# Altium PCB Mach in.PcbDoc
Units mil, origin at the board's own origin, x right, y up, seen from the top; angles counter-clockwise.
Board outline 4565 x 3920 mil, 2 copper layers (Top Layer, Bottom Layer); 54 components, 45 nets, 207 pads, 10 vias.
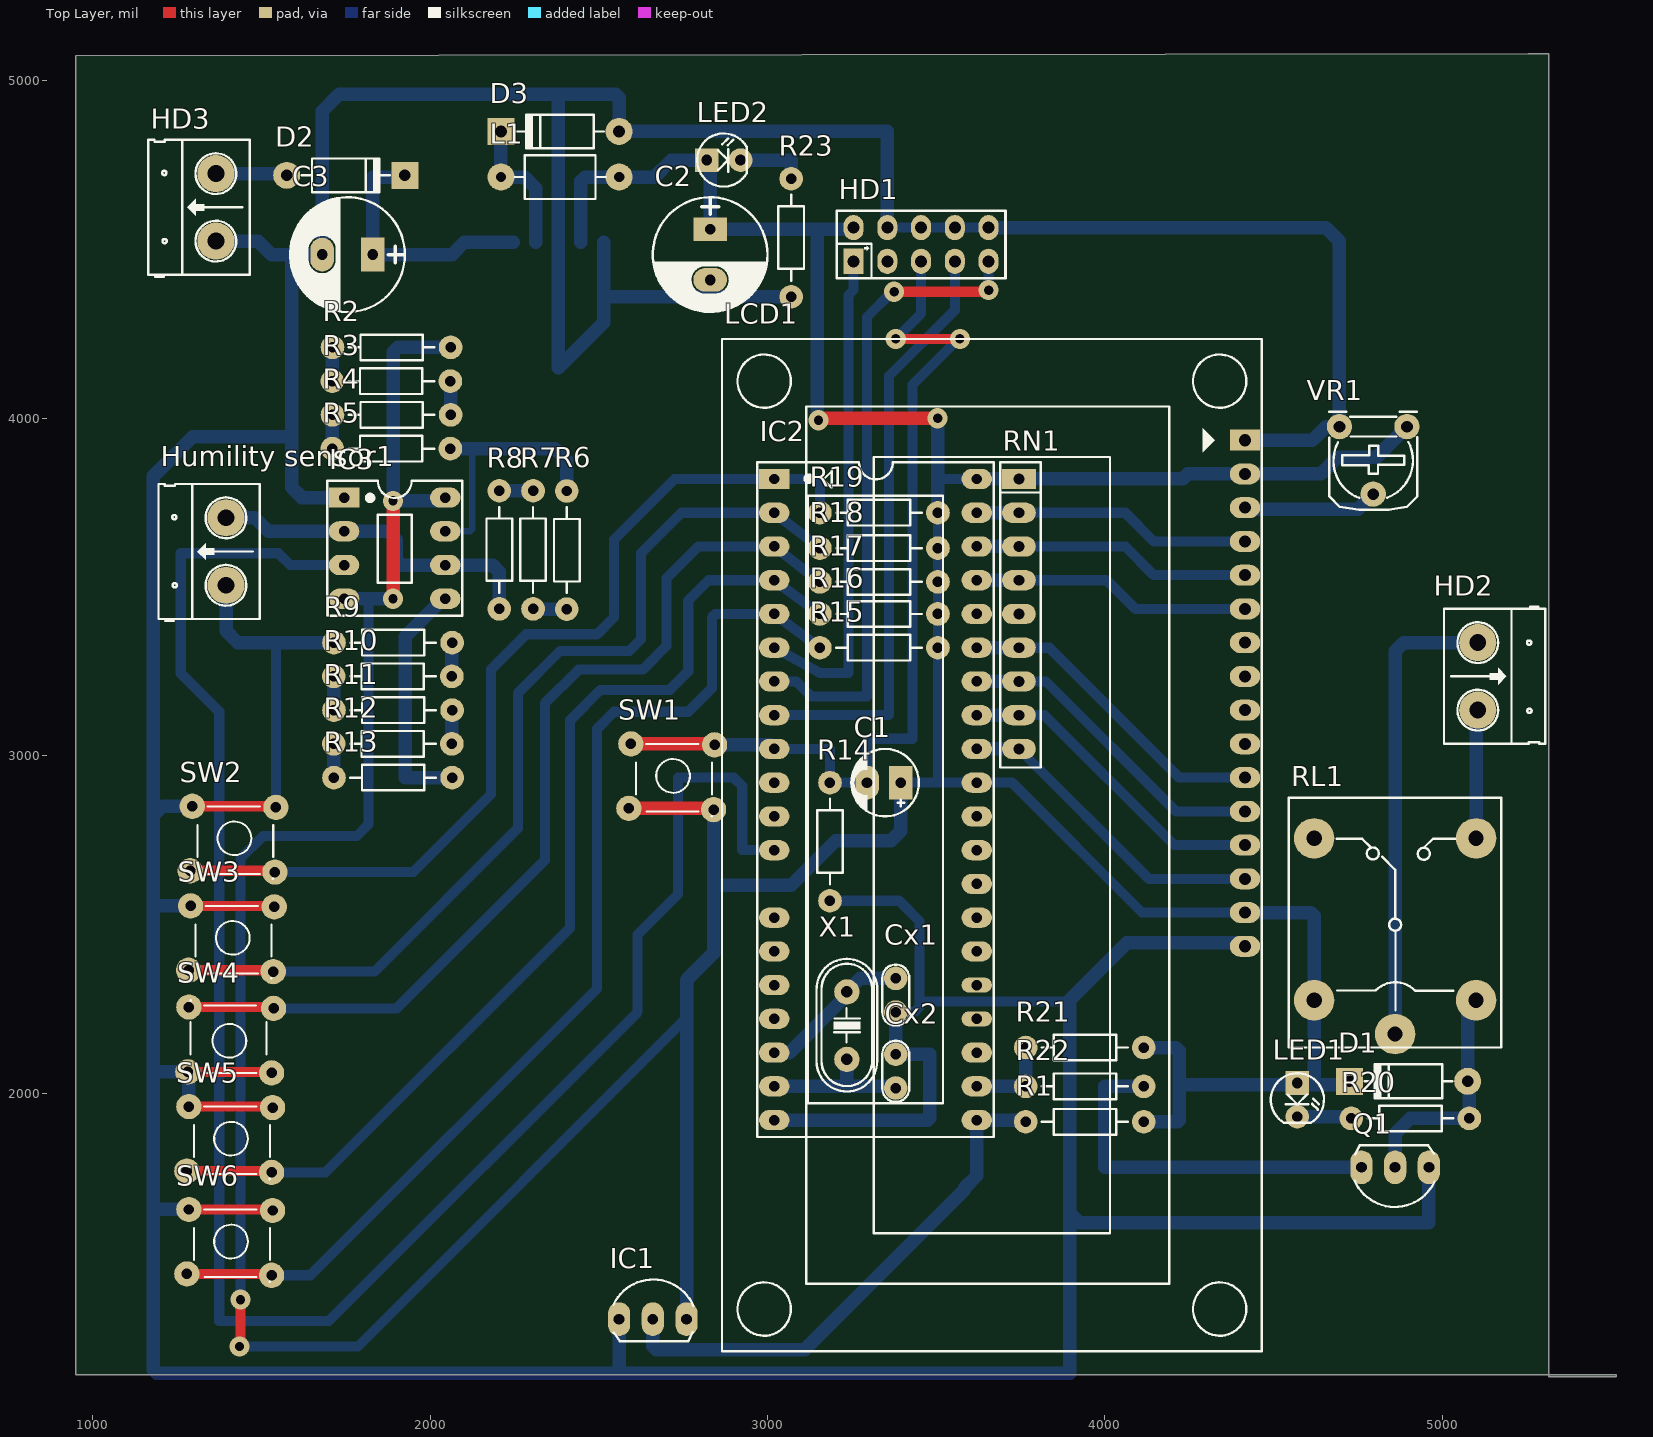
[diagram p0: Top Layer view]
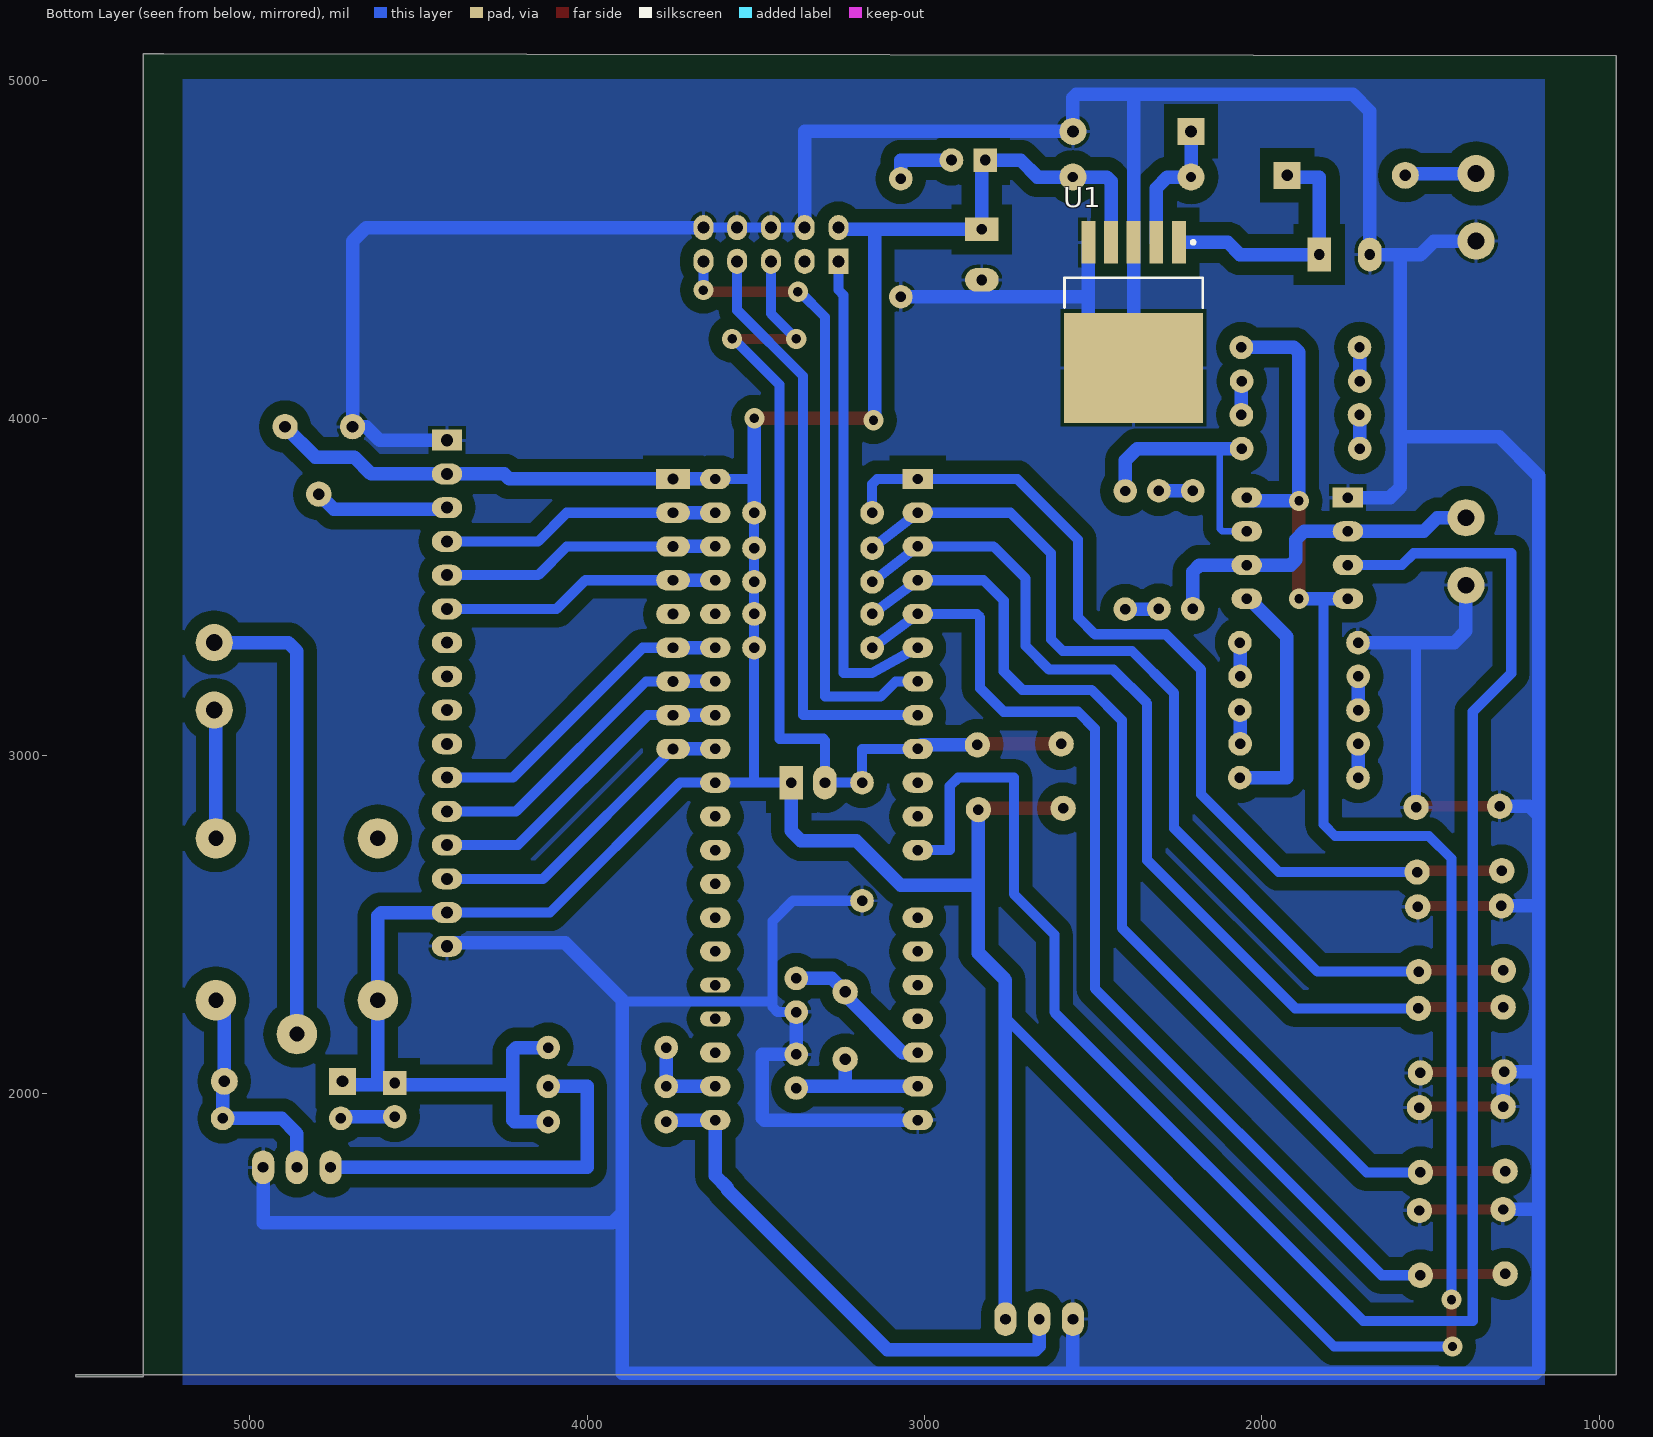
[diagram p1: Bottom Layer view, seen from below]
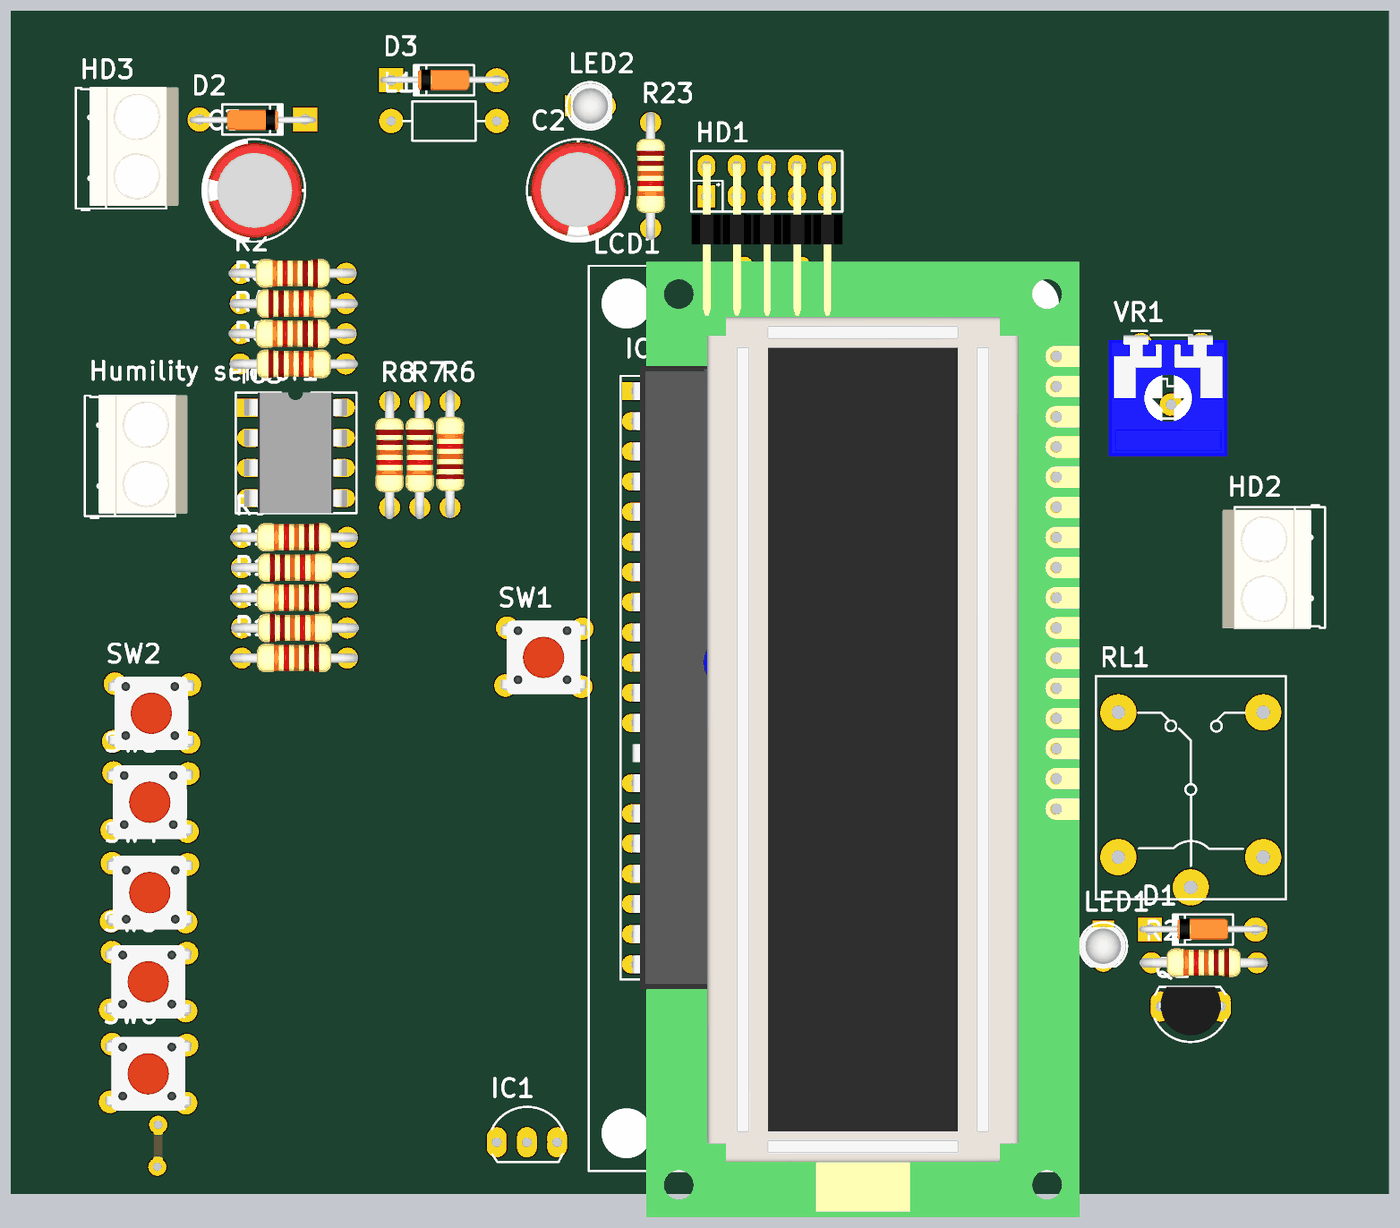
[diagram p2: 3D render of the assembled board from above, using the file's embedded part models]

## Layer stack, top to bottom
Top Layer: signal copper 1.4
Dielectric: dielectric 12.6, FR-4, Dk 4.8
Bottom Layer: signal copper 1.4

## Board outline
950,5075 950,1165 5515,1165 5515,1160 5325,1160 5315,1160 5315,3445 5315,5080 5255,5080

## Design rules (kind name [scope] priority, off if disabled: settings)
Clearance [All] p1: gap=40
PolygonConnect [All] p1: connectstyle=Relief reliefconductorwidth=10 reliefentries=4 polygonreliefangle="90 Angle"
RoutingVias [All] p1: holewidth=28 width=60 viastyle="Through Hole" minholewidth=28 minwidth=60 maxholewidth=28 maxwidth=60
SilkscreenOverComponentPads [All] p1: minsilkscreentomaskgap=10
SolderMaskExpansion [All] p1: expansion=4
Width [All] p1: maxlimit=40 minlimit=20 preferedwidth=30
27 further rules are at their usual default settings.

## Components (designator, comment, footprint, x,y, rotation, side; value= is the part's Value field where it differs from the comment)
C1 "10uF" CP1/2 3395,2920 r180 top
C2 "100uF/35V" CP1.5/3.4 2830,4560 r270 top
C3 "100uF/35V" CP1.5/3.4 1830,4485 r180 top
Cx1 "33pF" CN1 3380,2240 r90 top
Cx2 "33pF" CN1 3380,2115 r270 top
D1 "1N4007" D1A 5075,2035 r0 top
D2 "1N5822" D1A 1575,4720 r180 top
D3 "1N5822" D1A 2560,4850 r0 top
HD1 "Header 5x2" HED2X5_cen 3255,4465 r0 top
HD2 "Header 2" HED2 5105,3335 r270 top
HD3 "Header 2" HED2 1365,4525 r90 top
"Humility sensor1" "ss1" HED2 1395,3505 r90 top
IC1 "DS18S20" DS18S20 2660,1330 r0 top
IC2 "AT89S52" DIP40/W0.6 3020,3820 r270 top
IC3 "LM555" DIP8/W0.3 1745,3765 r270 top
L1 "100mH" L/0.4 2210,4715 r0 top
LCD1 "LCD 16x2A" LCD16X2 4415,3935 r270 top
LED1 "LED" LED-3 4570,2030 r270 top
LED2 "LED" LED-3 2820,4765 r0 top
Q1 "C1815" QTO-92 4860,1780 r180 top
R1 "10k" R1/4W 3765,1915 r0 top
R2 "47k" R1/4W 1710.6,4210 r0 top
R3 "2.7k" R1/4W 2060,4110 r180 top
R4 "100" R1/4W 1710.6,4010 r0 top
R5 "100" R1/4W 2060,3910 r180 top
R6 "560k" R1/4W 2405,3784.4 r270 top
R7 "15k" R1/4W 2305,3435 r90 top
R8 "1k" R1/4W 2205,3435 r90 top
R9 "100" R1/4W 1715,3335 r0 top
R10 "100" R1/4W 2064.4,3235 r180 top
R11 "6.8k" R1/4W 1715,3135 r0 top
R12 "82k" R1/4W 2064.4,3035 r180 top
R13 "820k" R1/4W 1715,2935 r0 top
R14 "10k" R1/4W 3185,2570 r90 top
R15 "10k" R1/4W 3155,3320 r0 top
R16 "10k" R1/4W 3155,3420 r0 top
R17 "10k" R1/4W 3155,3515 r0 top
R18 "10k" R1/4W 3155,3615 r0 top
R19 "10k" R1/4W 3155,3720 r0 top
R20 "1k" R1/4W 4730,1925 r0 top
R21 "10k" R1/4W 3765,2135 r0 top
R22 "4.7k" R1/4W 3765,2020 r0 top
R23 "1k" R1/4W 3070,4360 r90 top
RL1 "Relay 10A/12V" RL_SPDT_10A 4860,2175 r90 top
RN1 "10K" RN8 3745,3820 r270 top
SW1 "SW" SW4 2595,3035 r0 top
SW2 "SW" SW4 1295,2850 r0 top
SW3 "SW" SW4 1290,2555 r0 top
SW4 "SW" SW4 1530,2060 r180 top
SW5 "SW" SW4 1285,1960 r0 top
SW6 "SW" SW4 1285,1655 r0 top
U1 "LM2576" TS5B_N 2380,4285 r270 bottom
VR1 "10K" VR 4895,3975 r180 top
X1 "12Mhz" XT2 3235,2200 r270 top

## Footprints (in the part's own frame and the unit in brackets; to place one, negate y for a bottom-side part, rotate by r counter-clockwise, add the part's x,y. Pads: shape width x height; smd on the part's side, far side on the other; paste and mask are expansions set on the pad)
CN1 [mil]
  round 70 hole 31: 1(0,0) 2(100,0)
  silkscreen extent -40,-40 141,40, body extent -60,-30 170,37, height 265
CP1.5/3.4 [mil] "Tu hoa 220->470uF,16V, 470uF/16V,25V"
  rect 70x100 hole 32: 1(0,0)
  oval 70x100 hole 32: 2(150,0)
  silkscreen extent -95,-170 245,170, body extent -85,-157 230,157, height 446
CP1/2 [mil] "Tu hoa < 22uF/16>50V"
  rect 70x100 hole 32: 1(0,0)
  oval 70x100 hole 32: 2(100,0)
  silkscreen extent -53,-100 147,100, body extent -49,-99 149,99, height 287
D1A [mil] "Diode 1A, W 100mil, L 350mil"
  round 80 hole 35: 1(0,0)
  rect 80x80 hole 35: 2(-350,0)
  silkscreen extent -305,-50 -45,50, body extent -386,-33 34,36, height 84
DIP8/W0.3 [mil] "8 PIN, W 300mil, Pin to pin 100mil"
  rect 60x90 hole 31: 1(0,0)
  oval 60x90 hole 31: 2(100,0) 3(200,0) 4(300,0) 5(300,300) 6(200,300) 7(100,300) 8(0,300)
  silkscreen extent -50,-50 350,350, body extent -50,-40 350,336, height 201
DIP40/W0.6 [mil] "40 PIN, W 600mil, Pin to pin 100mil"
  rect 60x90 hole 31: 1(0,0)
  oval 60x90 hole 31: 2(100,0) 3(200,0) 4(300,0) 5(400,0) 6(500,0) 7(600,0) 8(700,0) 9(800,0) 10(900,0) 11(1000,0) 12(1100,0) 14(1300,0) 15(1400,0) 16(1500,0) 17(1600,0) 18(1700,0) 19(1800,0) 20(1900,0) 21(1900,600) 22(1800,600) 23(1700,600) 26(1400,600) 27(1300,600) 28(1200,600) 29(1100,600) 30(1000,600) 31(900,600) 32(800,600) 33(700,600) 34(600,600) 35(500,600) 36(400,600) 37(300,600) 38(200,600) 39(100,600) 40(0,600)
  oval 60x90 on Bottom Overlay: 13(1200,0)
  oval 45x90 hole 31: 24(1600,600) 25(1500,600)
  silkscreen extent -50,-50 1950,650, body extent -82,-10 1982,600, height 224
DS18S20 [mil] "TO-92"
  oval 66x100 hole 32: 3(100,0) 4(0,0) 5(-100,0)
  silkscreen extent -117,-65 120,118
HED2 [mil] "Header 2, 2 pin, hight 300mil, Pin to Pin 200, Colour Green"
  round 110 hole 50: 1(0,0) 2(200,0)
  silkscreen extent -106,-100 300,200, body extent -92,-140 302,155, height 394
HED2X5_cen [mm] "Connector; Header; 5x2 Position"
  rect 1.5x1.9 hole 0.9: 1(0,0)
  oval 1.5x1.9 hole 0.9: 2(2.54,0) 3(5.08,0) 4(7.62,0) 5(10.16,0) 6(0,2.54) 7(2.54,2.54) 8(5.08,2.54) 9(7.62,2.54) 10(10.16,2.54)
  silkscreen extent -1.27,-1.27 11.43,3.81, body extent -1.24,-10.02 11.46,2.86, height 5.02
L/0.4 [mil] "Inductor , 2 Pin, L 350mil, W 150 mil"
  round 80 hole 31: 1(0,0) 2(350,0)
  silkscreen extent 40,-65 310,65
LCD16X2 [mil] "LCD dipslay 16x2, 16 pin"
  rect 62x90 hole 36: 1(0,0)
  oval 62x90 hole 36: 2(100,0) 3(200,0) 4(300,0) 5(400,0) 6(500,0) 7(600,0) 8(700,0) 9(800,0) 10(900,0) 11(1000,0) 12(1100,0) 13(1200,0) 14(1300,0) 15(1400,0) 16(1500,0)
  round 157.48 on Top Overlay: "Hole 0"(-175,-75) "Hole 0"(-175,-1425) "Hole 0"(2575,-75) "Hole 0"(2575,-1425)
  silkscreen extent -300,-1550 2700,50, body extent -315,-1360 2855,77, height 414
LED-3 [mil] "LED 2 PIN, 3ly Only colour"
  rect 70x70 hole 32: 1(0,0)
  round 70 hole 32: 2(100,0)
  silkscreen extent -29,-78 118,79, body extent -13,-75 125,75, height 217
QTO-92 [mil] "TO-92"
  oval 66x100 hole 32: 1(-100,0) 2(0,0) 3(100,0)
  silkscreen extent -117,-65 120,118, body extent -109,-66 109,95, height 245
R1/4W [mil] "R 1/4W, 2 Pin, 350mil"
  round 70 hole 31: 1(0,0) 2(350,0)
  silkscreen extent 48,-38 302,38, body extent -40,-47 386,47, height 111
RL_SPDT_10A [mil] "Relay SPDT, 5 pin, 10A,W 650mil, L 800mil, H 800mil"
  round 120 hole 45: 1(0,0) 2(580,240) 3(580,-240) 4(100,-240) 5(100,240)
  silkscreen extent -40,-315 700,315
RN8 [mil] "R SIP8, 9 Pin"
  rect 60x100 hole 32: 1(0,0)
  oval 60x100 hole 32: 2(100,0) 3(200,0) 4(300,0) 5(400,0) 6(500,0) 7(600,0) 8(700,0) 9(800,0)
  silkscreen extent -50,-55 855,65, body extent -43,-44 843,5, height 259
SW4 [mil] "SW button 4pin, 250 x250 mil"
  round 75 hole 31: 1(0,0) 2(245,-195) 3(248,-3) 4(-6,-191)
  silkscreen extent 15,-215 240,0, body extent -36,-220 276,24, height 276
TS5B_N [mm] "D2-PAK, 6-Leads, Body 8.6x10.2mm, Pitch 1.7mm, Lead Span 14.1mm, IPC Medium Density"
  rect 3.2x1.05 smd: 1(-6,3.4) 2(-6,1.7) 3(-6,0) 4(-6,-1.7) 5(-6,-3.4)
  rect 8.3x10.45 smd: 6(3.45,0)
  silkscreen extent -6.12,-5.2 -1.1,5.2, body extent -3.35,-5.2 6.05,5.2, height 4.65
VR [mil] "Resistor Variable"
  round 75 hole 35: 1(0,0) 2(100,200) 3(200,0)
  silkscreen extent -31,-44 231,246, body extent -87,-30 307,372, height 165
XT2 [mil] "Footpin for Crystal 2 pin"
  round 75 hole 34: 1(-100,0) 2(100,0)
  silkscreen extent -198,-90 195,90, body extent -233,-93 213,90, height 138

## Part data
C1: library part CP1, "Cap P  0,1uF < 22uF , 16 - 50V"
C2 C3: library part CP3, "Cap 100uF/35V - 470uF/16V"
Cx1 Cx2: library part CN0, "Cremic For Xtal 1pF => 100pF"
D1 D2 D3: library part D1A, "Diode 1A"
HD1: library part HED5x2
HD2 HD3 "Humility sensor1": library part Hed2, "Header 2 (Green)"
IC1: "High Precision  1-Wire® Digital Thermometer"
IC2: "AT89S52, 8k Byte Flash Memory , 40 Pin"
IC3: "Timer"
L1: library part L1, "Inductor"
LCD1: library part LCD16x2A, "LCD dipslay 16 char, 2 line"
LED1 LED2: "LED Single colour Green and Red"
Q1: "NPN 600mW, ECB"
R1 R2 R3 R4 R5 R6 R7 R8 R9 R10 R11 R12 R13 R14 R15 R16 R17 R18 R19 R20 R21 R22 R23: library part R1/4W, "Resistor 1/4W"
RL1: library part "Relay 1", "Relay SPDT,10A - 12VDC 5 Pin"
RN1: library part RN8, "Resistor 8 (Thanh)"
SW1 SW2 SW3 SW4 SW5 SW6: library part SW4, "Switch button 4 pin"
VR1: library part VR1, "Var Resistor"
X1: library part XT2, "Crystal For all Crystal 2pin."

## Via types
v1: diameter 60, hole 28, Top Layer to Bottom Layer, 10 vias

## Nets (pads, with @x,y where several pads share a name; then routed paths per layer and width w, separated by ;. In a path a pad name is that pad's centre, name@x,y a point inside that pad or via, vN(x,y) a via of type N, cw(c..) or ccw(c..) an arc to the next point about the centre after c; other vN are vias at no path point)
12V: D2.1 HD3.2 | length 215
  Bottom Layer w40: HD3.2 1575,4725 D2.1
DOWN: IC2.4 R16.1 SW5.2 SW5.4 | length 3120.9
  Top Layer w30: SW5.4 1526,1769 SW5.2
  Bottom Layer w30: SW5.2 1690,1765 2415,2490 2415,3105 2505,3195 2710,3195 2765,3250 2765,3460 2825,3520 IC2.4 R16.1
GND: "Humility sensor1.1" C2.2 C3.2 Cx1.1 Cx2.1 D3.1 HD1.7 HD1.8 HD1.9 HD1.10 HD3.1 IC1.5 IC2.20 IC3.1 LCD1.1 LCD1.16 Q1.1 R9.1 R14.1 R23.1 SW2.1 SW2.3 SW3.1 SW3.3 SW4.1 SW4.3 SW5.1 SW5.3 SW6.1 SW6.3 U1.3 U1.5 U1.6 VR1.3 | length 21331.6
  Top Layer w30: SW4.3 1527,2063 SW4.1 ; SW6.1 1530,1655 SW6.3 ; SW5.1 1530,1960 SW5.3 ; SW3.1 1535,2555 SW3.3 ; SW2.1 1540,2850 SW2.3
  Bottom Layer w30: SW2.3 1543,3328 1550,3335 ; R14.1 3390,2570 3450,2510 3450,2271 ; HD1.7 HD1.8 HD1.9 HD1.10 ; Cx1.1 3435,2240 3450,2255 3450,2271 ; 3895,2275 3891,2271 3450,2271
  Bottom Layer w40: 1180,2815 1180,2555 ; SW6.1 1180,1655 ; SW5.1 1285,2060 SW4.3 1187,2063 1180,2070 ; SW3.1 1180,2555 ; SW2.1 1207,2850 1180,2823 1180,3829 1296,3945 1590,3945 ; HD3.1 1490,4525 1530,4485 1595,4485 ; 1395,3505 1395,3370 1430,3335 1550,3335 R9.1 ; IC3.1 1620,3765 1590,3795 1590,3945 ; U1.5 2513.86,4360 ; IC1.5 2560,1170 ; IC2.20 3475,1920 3480,1925 3480,2115 Cx2.1 Cx1.1 ; R23.1 2513.86,4360 ; HD1.7 3355,4850 D3.1 2560,4950 2550,4960 2370,4960 ; HD1.10 4655,4565 4695,4525 VR1.3 4655,3975 4615,3935 LCD1.1 ; 3900,1640 3895,1645 ; LCD1.16 4405,2445 4065,2445 3895,2275 3895,1645 ; Q1.1 4960,1615 3925,1615 3895,1645 ; 1180,1655 1180,1180 1190,1170 2560,1170 ; 1180,1655 1180,2070 ; 1180,2070 1180,2555 ; 1590,3945 1590,4480 1595,4485 ; 1595,4485 C3.2 1680,4910 1730,4960 2370,4960 ; 2370,4960 2380,4950 U1.3 U1.6 2513.86,4283.03 2513.86,4360 ; 2560,1170 3895,1170 3895,1645
MISO: HD1.5 IC2.7 | length 1899.7
  Top Layer w30: v1(3375,4375) 3655,4375 v1(3655,4380)
  Bottom Layer w30: IC2.7 3085,3220 3130,3175 3295,3175 3295,4300 3370,4375 v1(3375,4375) ; v1(3655,4380) HD1.5
MODE: IC2.1 R19.1 SW2.2 SW2.4 | length 2792.9
  Top Layer w30: SW2.4 1536,2659 SW2.2
  Bottom Layer w30: SW2.2 1950,2655 2180,2885 2180,3255 2285,3360 2495,3360 2545,3410 2545,3640 2725,3820 IC2.1 3140,3820 3155,3805 R19.1
MOSI: HD1.1 IC2.6 | length 1465.6
  Bottom Layer w30: IC2.6 3155,3245 3240,3245 3240,4365 3255,4380 HD1.1
NetC3_1: C3.1 D2.2 U1.1 | length 761.1
  Bottom Layer w40: D2.2 1925,4715 1830,4715 C3.1 2065,4485 2101.22,4521.22 U1.1
NetCx1_2: Cx1.2 IC2.18 X1.1 | length 457
  Bottom Layer w40: IC2.18 3065,2120 3235,2290 X1.1 3275,2340 Cx1.2
NetCx2_2: Cx2.2 IC2.19 X1.2 | length 442.1
  Bottom Layer w40: IC2.19 3235,2020 ; X1.2 3235,2020 ; Cx2.2 3375,2020 3235,2020
NetD1_1: D1.1 Q1.2 R20.2 RL1.4 | length 701.1
  Bottom Layer w40: Q1.2 4860,1880 4905,1925 R20.2 5080,2030 D1.1 5075,2250 RL1.4
NetD3_2: D3.2 L1.1 U1.2 | length 412.5
  Bottom Layer w40: D3.2 L1.1 2280,4715 2313.07,4681.93 U1.2
NetHD2_1: HD2.1 RL1.1 | length 1390.4
  Bottom Layer w40: RL1.1 4860,3310 4885,3335 HD2.1
NetHD2_2: HD2.2 RL1.3 | length 382.1
  Bottom Layer w40: RL1.3 5100,3130 HD2.2
"NetHumility sensor1_2": "Humility sensor1.2" IC3.2 IC3.6 R8.1 | length 1021.4
  Bottom Layer w40: 1395,3705 1480,3705 1520,3665 IC3.2 1875,3665 1900,3640 1900,3580 1915,3565 IC3.6 2185,3565 2205,3545 R8.1
NetIC2_32: IC2.32 LCD1.14 RN1.9 | length 954.5
  Bottom Layer w30: RN1.9 4130,2635 LCD1.14
  Bottom Layer w40: IC2.32 RN1.9
NetIC2_33: IC2.33 LCD1.13 RN1.8 | length 954.5
  Bottom Layer w30: RN1.8 3820,3120 4205,2735 LCD1.13
  Bottom Layer w40: IC2.33 RN1.8
NetIC2_34: IC2.34 LCD1.12 RN1.7 | length 954.5
  Bottom Layer w30: RN1.7 3825,3220 4210,2835 LCD1.12
  Bottom Layer w40: IC2.34 RN1.7
NetIC2_35: IC2.35 LCD1.11 RN1.6 | length 954.5
  Bottom Layer w30: RN1.6 3835,3320 4220,2935 LCD1.11
  Bottom Layer w40: IC2.35 RN1.6
NetIC2_37: IC2.37 LCD1.6 RN1.4 | length 830.2
  Bottom Layer w30: RN1.4 4005,3520 4090,3435 LCD1.6
  Bottom Layer w40: IC2.37 RN1.4
NetIC2_38: IC2.38 LCD1.5 RN1.3 | length 830.2
  Bottom Layer w30: RN1.3 4060,3620 4145,3535 LCD1.5
  Bottom Layer w40: IC2.38 RN1.3
NetIC2_39: IC2.39 LCD1.4 RN1.2 | length 830.2
  Bottom Layer w30: RN1.2 4060,3720 4145,3635 LCD1.4
  Bottom Layer w40: IC2.39 RN1.2
NetIC3_5: IC3.5 R13.2 | length 722.4
  Bottom Layer w40: IC3.5 2038,3465 1926,3353 1926,2935 R13.2
NetIC3_7: IC3.7 R5.1 R6.1 | length 766.4
  Bottom Layer w20: IC3.7 2117,3665 2125,3673 2125,3906
  Bottom Layer w40: R5.1 2370,3910 2405,3875 R6.1
NetLCD1_3: LCD1.3 VR1.2 | length 400.7
  Bottom Layer w40: LCD1.3 4420,3730 4750,3730 VR1.2
NetLED1_2: LED1.2 R20.1 | length 162.1
  Bottom Layer w40: LED1.2 4725,1930 R20.1
NetLED2_2: LED2.2 R23.2 | length 205
  Bottom Layer w40: LED2.2 3070,4765 R23.2
NetQ1_3: Q1.3 R22.2 | length 1115
  Bottom Layer w40: R22.2 4000,2020 4000,1780 Q1.3
NetR2_1: R2.1 R3.2 | length 100.2
  Bottom Layer w40: R3.2 1710,4209.4 R2.1
NetR3_1: R3.1 R4.2 | length 100.2
  Bottom Layer w40: R3.1 2060.6,4109.4 R4.2
NetR4_1: R4.1 R5.2 | length 100.2
  Bottom Layer w40: R5.2 1710.6,3910.6 R4.1
NetR6_2: R6.2 R7.1 | length 100.2
  Bottom Layer w40: R7.1 2305.6,3434.4 R6.2
NetR7_2: R7.2 R8.2 | length 100
  Bottom Layer w40: R8.2 R7.2
NetR9_2: R9.2 R10.1 | length 100.2
  Bottom Layer w40: R10.1 2064.4,3334.4 R9.2
NetR10_2: R10.2 R11.1 | length 100.2
  Bottom Layer w40: R10.2 1715,3234.4 R11.1
NetR11_2: R11.2 R12.1 | length 100.2
  Bottom Layer w40: R12.1 2064.4,3134.4 R11.2
NetR12_2: R12.2 R13.1 | length 100.2
  Bottom Layer w40: R12.2 1715,3034.4 R13.1
RELAY: IC2.22 R21.1 R22.1 | length 260
  Bottom Layer w40: IC2.22 R22.1 R21.1
RST: C1.2 HD1.3 IC2.9 R14.2 SW1.1 SW1.3 | length 2782.3
  Top Layer w30: v1(3380,4235) v1(3570,4235)
  Top Layer w40: SW1.1 2840,3035 SW1.3
  Bottom Layer w30: IC2.9 3185,3020 R14.2 C1.2 3295,3045 3300,3050 3430,3050 3430,4100 3560,4230 3560,4245 v1(3570,4235) ; v1(3380,4235) 3455,4310 HD1.3
  Bottom Layer w40: SW1.3 3008,3032 IC2.9
SCK: HD1.4 IC2.8 | length 1765.8
  Bottom Layer w30: IC2.8 3360,3120 3360,4125 3555,4320 HD1.4
SS1: IC2.12 IC3.3 | length 5669.8
  Bottom Layer w30: IC3.3 1585,3565 1550,3600 1261,3600 1261,3244 1375,3130 1375,1325 1700,1325 2615,2240 2615,2470 2735,2590 2735,2935 2900,2935 2925,2910 2925,2720 IC2.12
START: IC2.5 R15.1 SW6.2 SW6.4 | length 3290.9
  Top Layer w30: SW6.4 SW6.2@1526,1464
  Bottom Layer w30: SW6.2 1645,1460 2495,2310 2495,3080 2545,3130 2765,3130 2835,3200 2835,3410 2845,3420 IC2.5 R15.1
TEMP: IC1.4 IC2.21 R1.1 | length 1572.5
  Bottom Layer w40: IC1.4 2660,1250 2670,1240 3110,1240 3585,1715 3585,1720 3620,1755 IC2.21 3760,1920 R1.1
TIMER: IC2.2 R18.1 SW3.2 SW3.4 | length 2850
  Top Layer w30: SW3.4 SW3.2@1531,2364
  Bottom Layer w30: SW3.2 1835,2360 2260,2785 2260,3185 2385,3310 2590,3310 2625,3345 2625,3600 2745,3720 IC2.2 R18.1
UP: IC2.3 R17.1 SW4.2 SW4.4 | length 2864.3
  Top Layer w30: SW4.2 1532,2255 SW4.4
  Bottom Layer w30: SW4.4 1901,2251 2340,2690 2340,3155 2440,3255 2630,3255 2700,3325 2700,3525 2795,3620 IC2.3 R17.1
VCC: C1.1 C2.1 D1.2 HD1.6 IC1.3 IC2.31 IC2.40 IC3.4 IC3.8 L1.2 LCD1.2 LCD1.15 LED1.1 LED2.1 R1.2 R2.2 R15.2 R16.2 R17.2 R18.2 R19.2 R21.2 RL1.5 RN1.1 SW1.2 SW1.4 U1.4 VR1.1 | length 15538.7
  Top Layer w30: v1(1435,1249) 1438,1252 v1(1438,1388)
  Top Layer w40: v1(1890,3465) v1(1890,3755) ; SW1.4 2836,2844 SW1.2 ; v1(3151,3994) 3157,4000 v1(3504,4000)
  Bottom Layer w30: v1(1435,1249) 1786,1249 2760,2223 2760,2231 ; v1(1438,1388) 1438,2695 1505,2762 1783,2762 1817,2796 1817,3465 ; C1.1 3495,2920 ; R19.2 R18.2 R17.2 R16.2 R15.2 3505,2930 3495,2920 ; 3505,3810 3515,3820 IC2.40 ; LCD1.15 4110,2535 3725,2920 IC2.31 3495,2920
  Bottom Layer w40: IC3.4 1817,3465 v1(1890,3465) ; IC3.8 2035,3755 v1(1890,3755) 1890,4195 1905,4210 R2.2 ; U1.4 2446.93,4701.93 2460,4715 L1.2 2665,4715 2715,4765 LED2.1 2830,4755 C2.1 3148,4560 ; IC1.3 2760,2223 ; 2760,2231 2760,2335 2840,2415 2840,2616 ; SW1.2 2840,2616 ; v1(3151,3994) 3148,3991 3148,4560 ; HD1.6 3250,4560 3148,4560 ; C1.1 3395,2777 3366,2748 3202,2748 3070,2616 2840,2616 ; v1(3504,4000) 3505,3999 3505,3810 R19.2 ; IC2.40 RN1.1 4230,3820 4245,3835 LCD1.2 4640,3835 4690,3885 4805,3885 VR1.1 ; R1.2 4215,1915 4220,1920 4220,2025 ; R21.2 4210,2135 4220,2125 4220,2025 ; LCD1.15 4610,2535 4620,2525 RL1.5 4620,2030 ; D1.2 4715,2025 4220,2025
pads on no net: "LCD1.Hole 0" HD1.2 IC2.10 IC2.11 IC2.13 IC2.14 IC2.15 IC2.16 IC2.17 IC2.23 IC2.24 IC2.25 IC2.26 IC2.27 IC2.28 IC2.29 IC2.30 IC2.36 LCD1.7 LCD1.8 LCD1.9 LCD1.10 RL1.2 RN1.5

## Polygon pours and split planes (outlines as drawn)
GND on Bottom Layer "Bottom Layer-No Net" (solid, pour order 2): 1161,5005 1161,1135 5145,1135 5198,1135 5198,5005